# EAGLE board treiber (EAGLE 6.4)
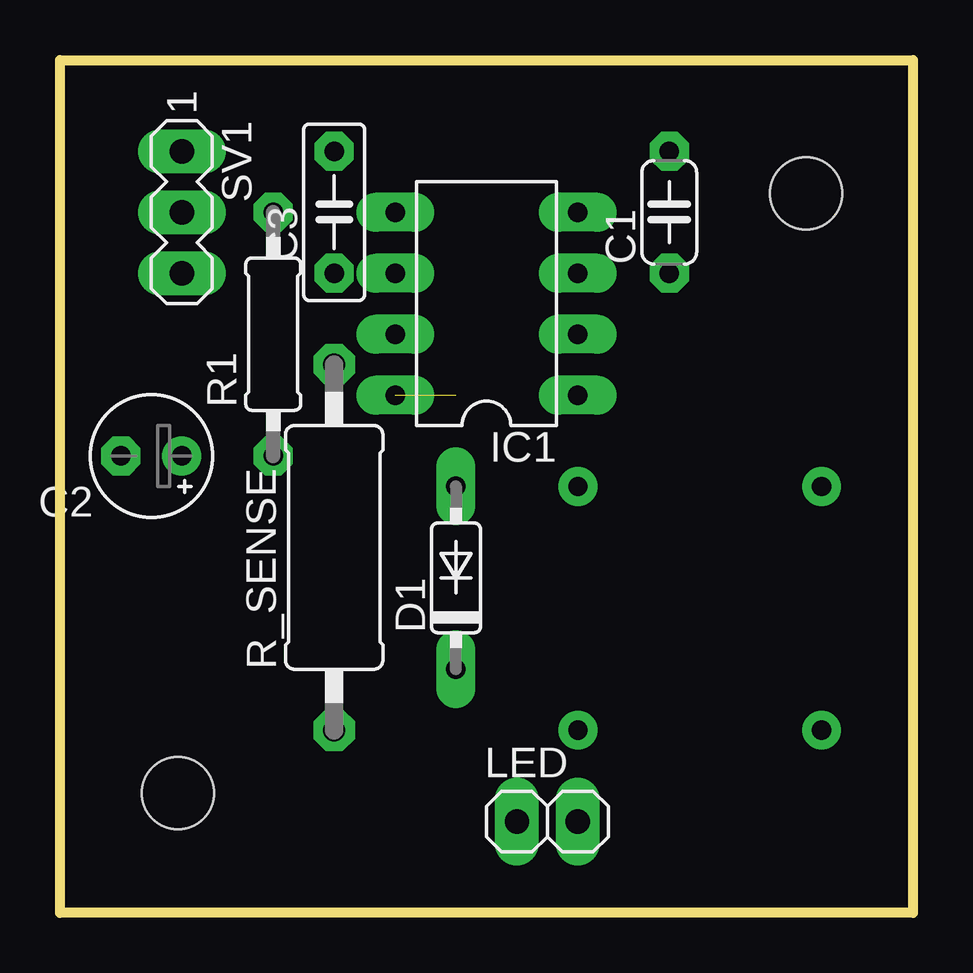
[diagram p0: board, top side]
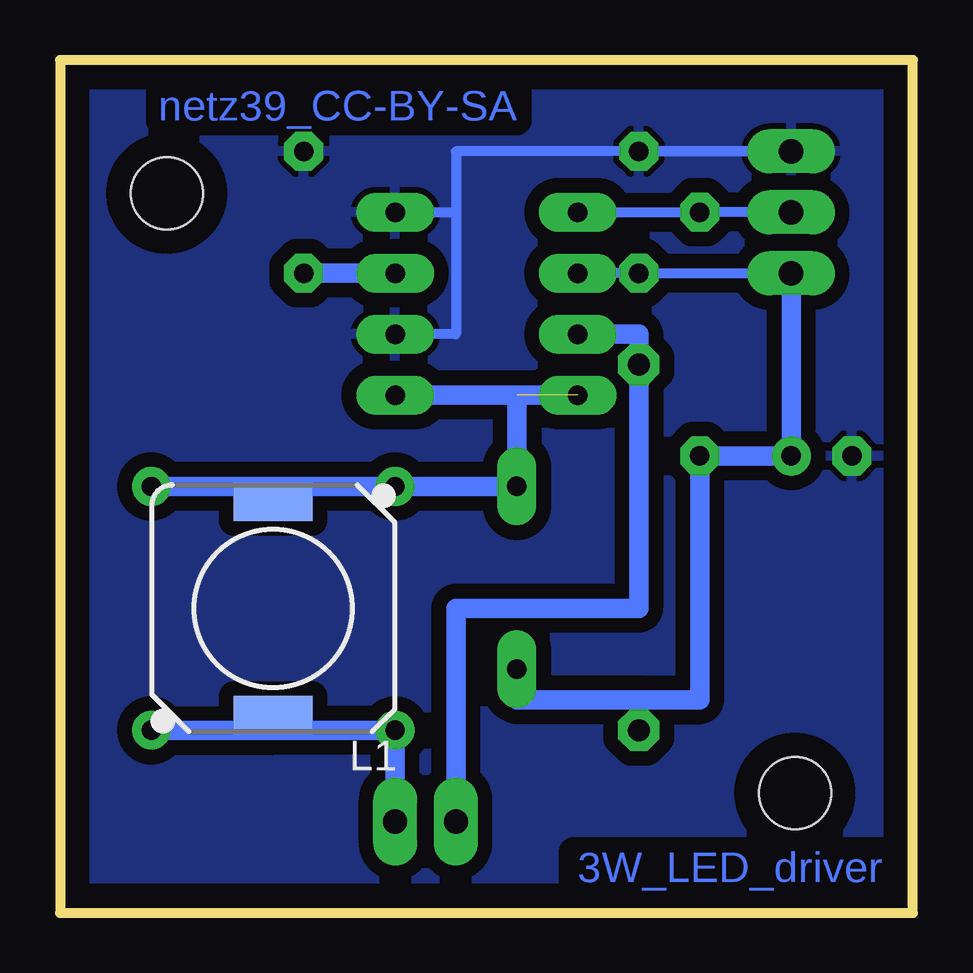
[diagram p1: board, bottom side, seen from below]

Size 35.56 x 35.56 mm. Coordinates in mm from the lower left corner, seen from the top.
Outline: 0,0 0,35.56 35.56,35.56 35.56,0 0,0
Copper layers (1*16): Top 0.035mm / dielectric 1.5mm / Bottom 0.035mm
Design rules "default *": minimum track width 16mil, minimum drill 24mil, track to track 16mil, track to pad 16mil, pad to pad 16mil, via to via 16mil, smd to smd 8mil, copper to edge 40mil, drill to drill 16mil, minimum pad ring 16mil, minimum via ring 16mil, stop-mask expansion 4mil, vias tented up to drill 0mil, thermal gap 10mil
Holes 3 mm at 4.92,5 31.11,30

## Footprints (pad centres in the part's own frame; a part is rotated, then mirrored left to right if it is on the bottom)
C050-024X044 = drill 0.813 octagon: 1 -2.54,0; 2 2.54,0
E2,5-5 = drill 0.813 pad 1.6: + -1.27,0 | drill 0.813 pad 1.6 octagon: - 1.27,0
C5B2.5 = drill 0.813 pad 1.6 octagon: 1 -2.54,0; 2 2.54,0
DO35-7 = drill 0.813 long: A 3.81,0; C -3.81,0
DIL08 = drill 0.813 long: 1 -3.81,-3.81; 2 -1.27,-3.81; 3 1.27,-3.81; 4 3.81,-3.81; 5 3.81,3.81; 6 1.27,3.81; 7 -1.27,3.81; 8 -3.81,3.81
DR1030 = smd 3.3 x 1.6: 1 0,4.45; 2 0,-4.45
1X02 = drill 1.016 long: 1 -1.27,0; 2 1.27,0
0207/10 = drill 0.813 octagon: 1 -5.08,0; 2 5.08,0
0411/15 = drill 0.914 octagon: 1 -7.62,0; 2 7.62,0
MA03-1 = drill 1.016 long: 1 -2.54,0; 2 0,0; 3 2.54,0

## Placement (x,y rotation side)
C1  330p  [C050-024X044]  25.4,29.21 90 top
C2  68µ  [E2,5-5]  3.81,19.05 180 top
C3  100n  [C5B2.5]  11.43,29.21 90 top
D1  MBRS240  [DO35-7]  16.51,13.97 90 top
IC1  MC34063AP  [DIL08]  17.78,25.4 90 top
L1  220µ  [DR1030]  26.67,12.7 180 bottom
LED  3W  [1X02]  20.32,3.81 0 top
R1  4.7K  [0207/10]  8.89,24.13 90 top
R_SENSE  0.18R  [0411/15]  11.43,15.24 90 top
SV1  Control  [MA03-1]  5.08,29.21 270 top

## Library data of the parts
C1 C2 R1 R_SENSE = resistor
C3 = capacitor-wima
D1 = diode
IC1 = mc34063
L1 = inductors
LED = pinhead
SV1 = con-lstb; OC_FARNELL: unknown; OC_NEWARK: unknown

## Nets
GND: C1.2 C2.- C3.2 IC1.2 IC1.4 SV1.1
N$1: C1.1 IC1.3
N$2: D1.A IC1.1 IC1.8 L1.2
N$3: IC1.7 LED.1 R_SENSE.2
N$4: L1.1 LED.2
PWM: IC1.5 R1.2 SV1.2
VCC: C2.+ C3.1 D1.C IC1.6 R1.1 R_SENSE.1 SV1.3

## Tracks (layer width: path | path; a pad name or v marks a point on that pad's centre or on a via)
GND
  Bottom 0.406: IC1.4 19.05,29.21 | 19.05,29.21 19.05,24.13 IC1.2 | SV1.1 19.05,31.75 19.05,29.21 | C3.2 SV1.1 | 3.81,31.75 SV1.1
  pour Bottom (isolate 0.61): 0,35.56 0,0 35.56,0 35.56,35.56
N$1
  Bottom 0.813: IC1.3 C1.1
N$2  (via drill 0.8)  (1 unrouted)
  Bottom 0.406: 26.67,17.78 L1.2
  Bottom 0.813: v31.75,17.78 26.67,17.78 D1.A 16.51,21.59 | IC1.8 IC1.1
N$3
  Bottom 0.813: IC1.7 11.43,24.13 R_SENSE.2 11.43,12.7 19.05,12.7 LED.1
N$4
  Bottom 0.406: 26.67,7.62 L1.1
  Bottom 0.813: LED.2 21.59,7.62 26.67,7.62 31.75,7.62
N$10  (via drill 0.8)
  other vias: 21.59,17.78
N$11  (via drill 0.8)
  other vias: 31.75,7.62
N$12  (via drill 0.8)
  other vias: 21.59,7.62
PWM
  Bottom 0.406: IC1.5 R1.2 SV1.2
VCC
  Bottom 0.406: IC1.6 C3.1 SV1.3
  Bottom 0.813: D1.C 16.51,8.89 11.43,8.89 | SV1.3 C2.+ R1.1 8.89,8.89 11.43,8.89 | R_SENSE.1 11.43,8.89

## Text on the board
Bottom: netz39_CC-BY-SA | 3W_LED_driver